# Altium PCB STM32_PCB.PcbDoc
Units mm, origin at the board's own origin, x right, y up, seen from the top; angles counter-clockwise.
Board outline 45 x 45 mm, 2 copper layers (Top Layer, Bottom Layer); 38 components, 26 nets, 182 pads, 49 vias.
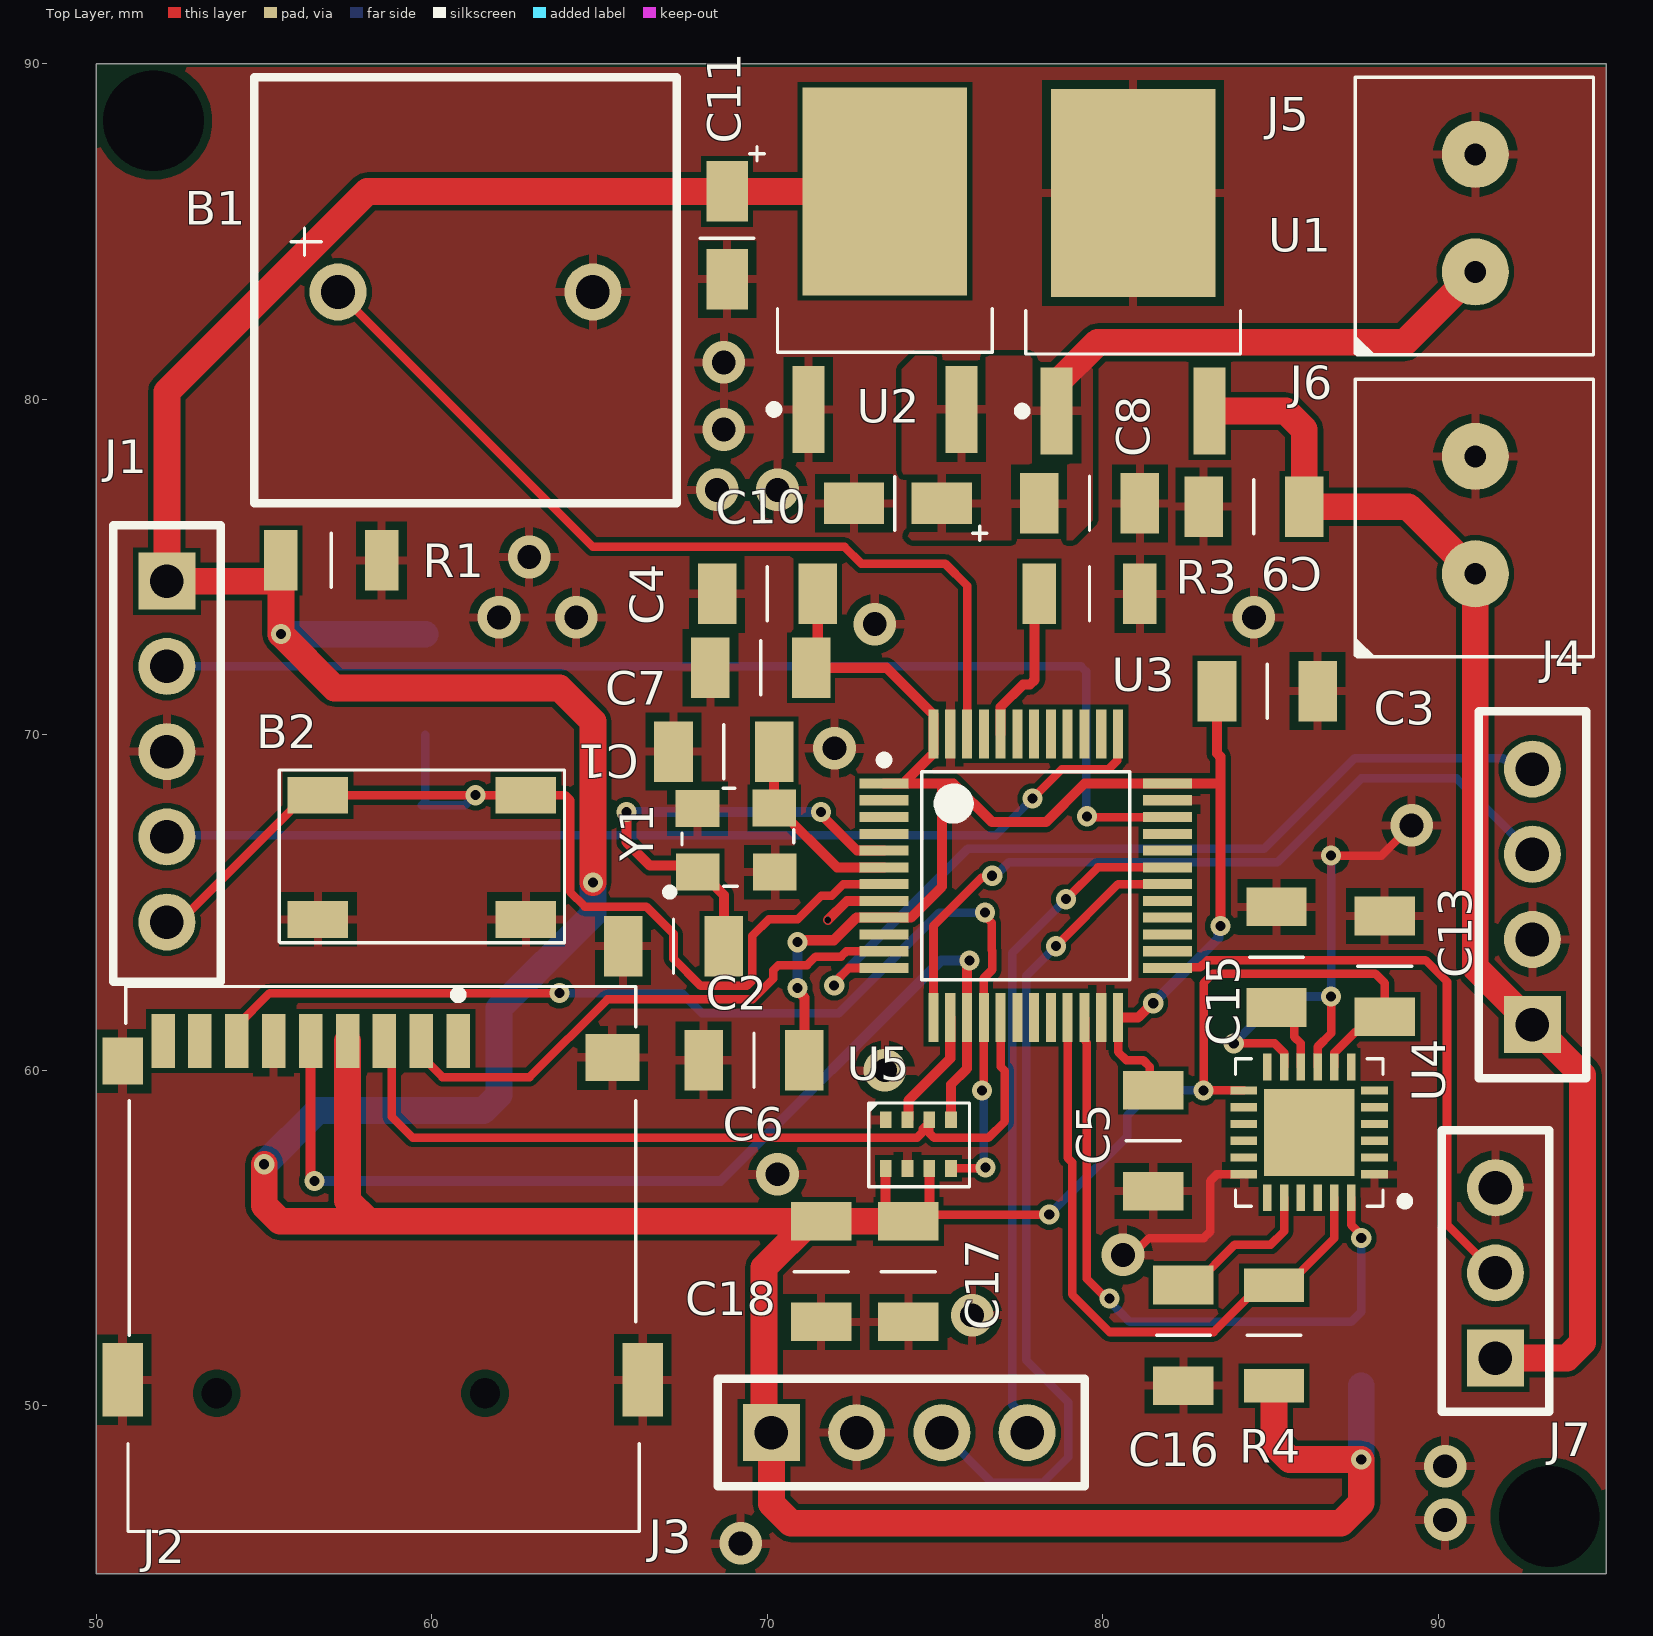
[diagram p0: Top Layer view]
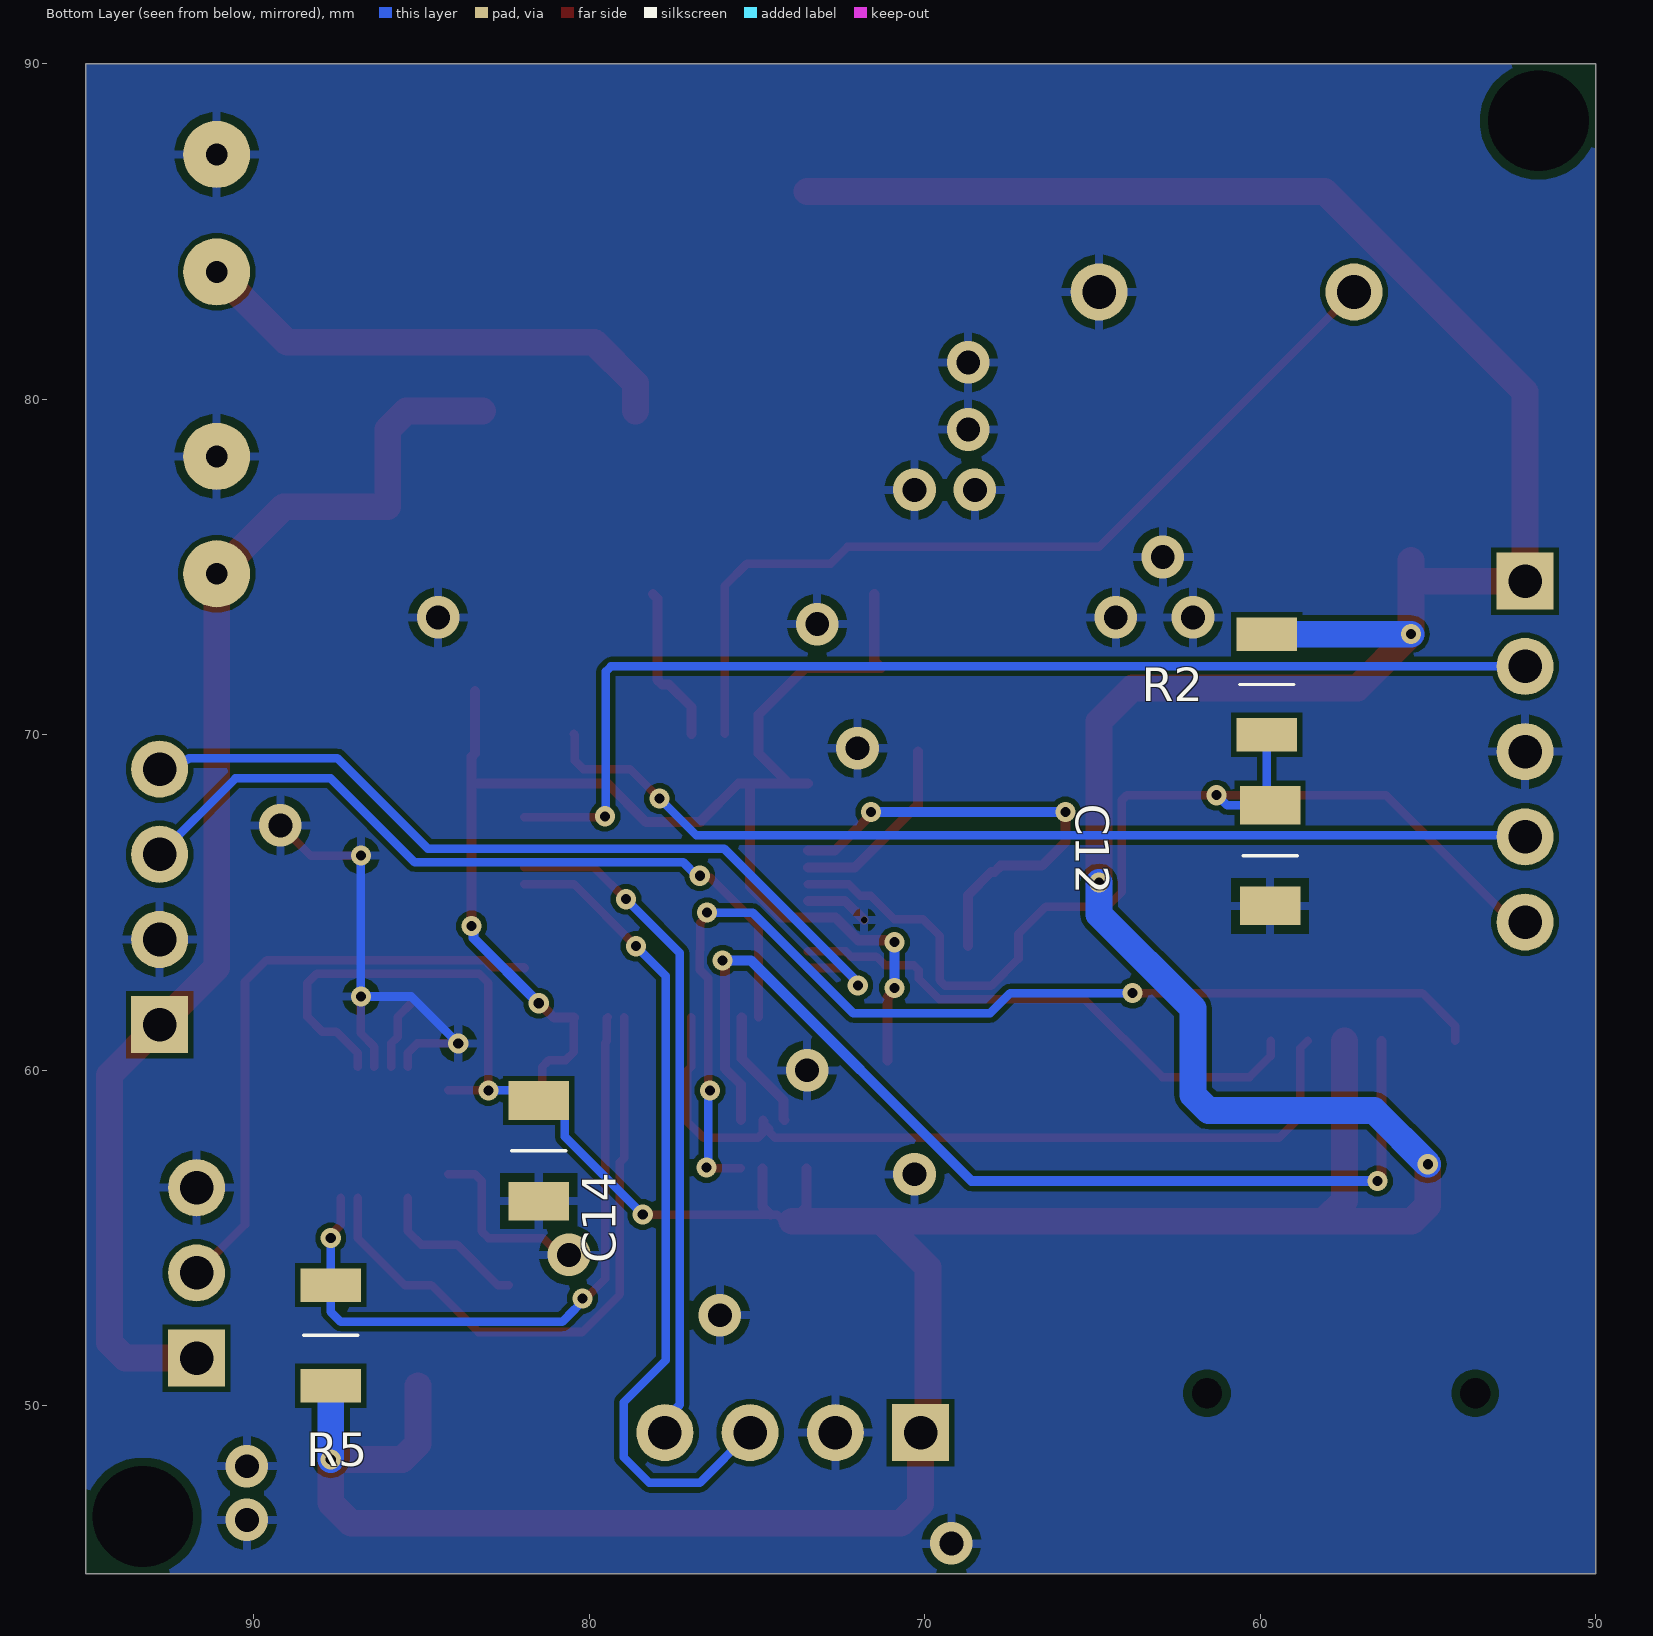
[diagram p1: Bottom Layer view, seen from below]
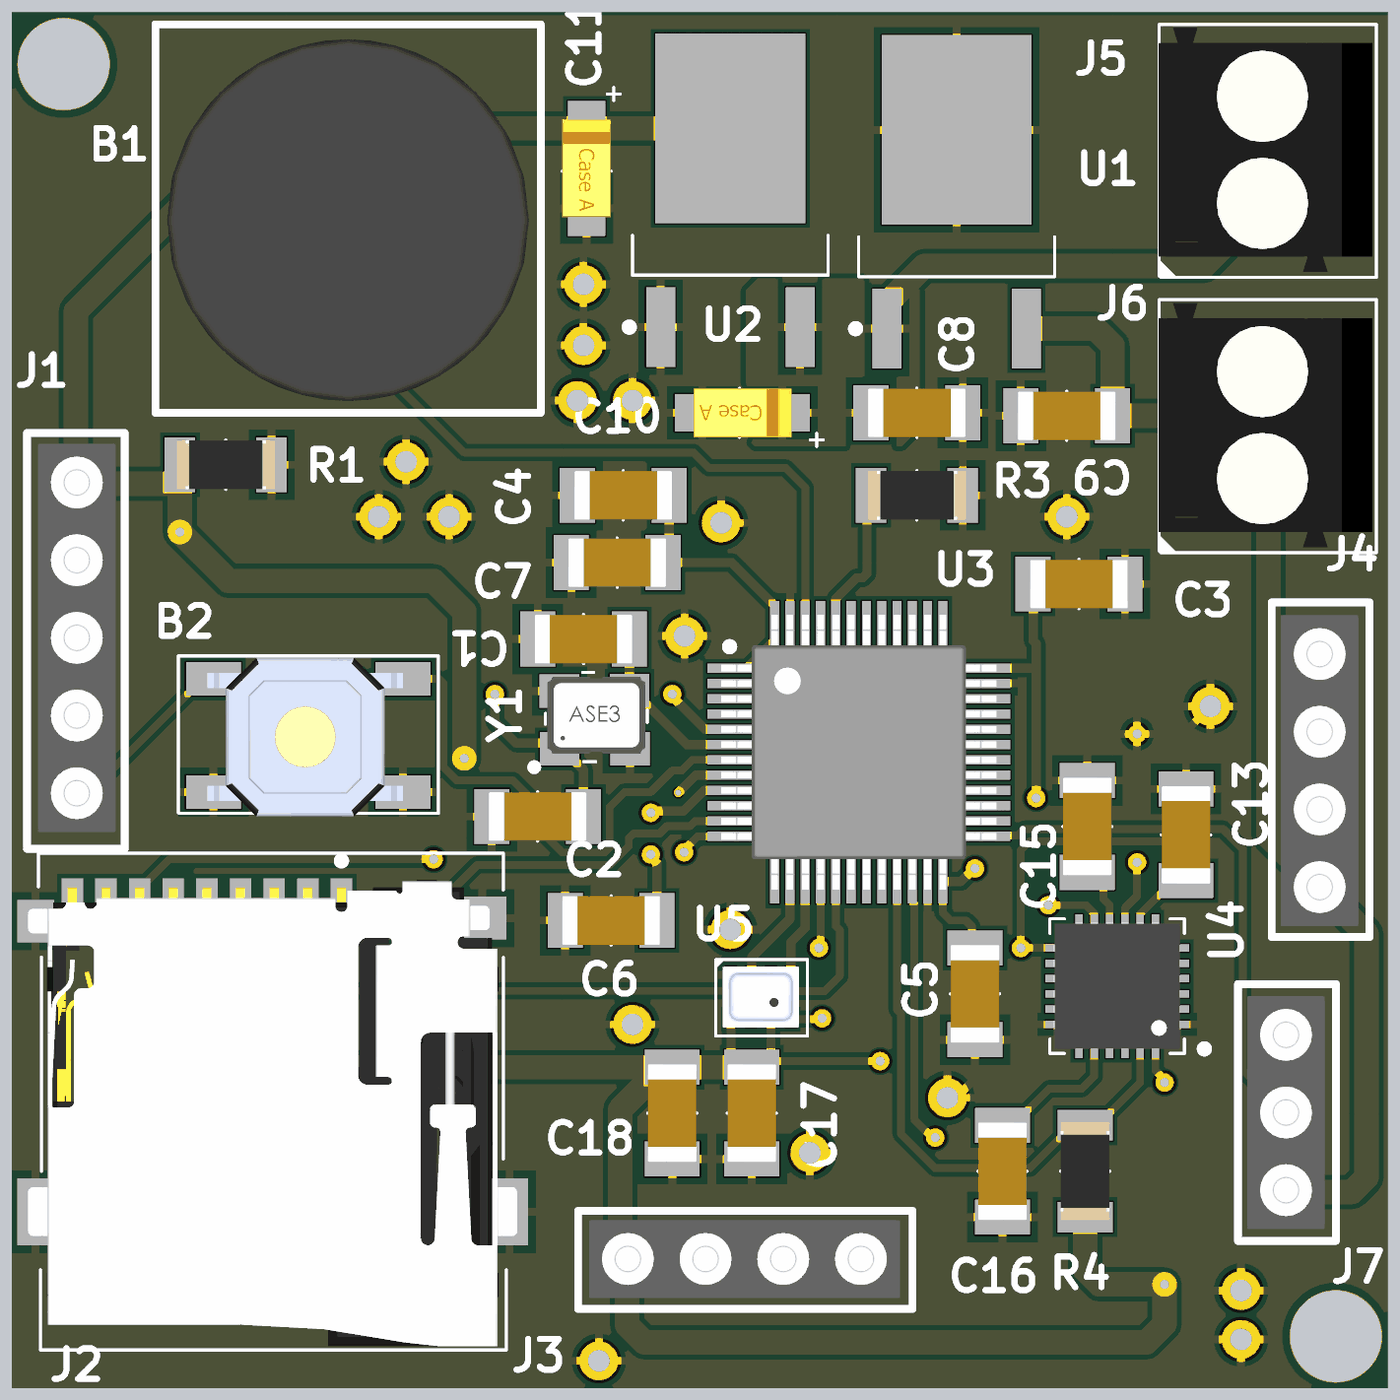
[diagram p2: 3D render of the assembled board from above, using the file's embedded part models]
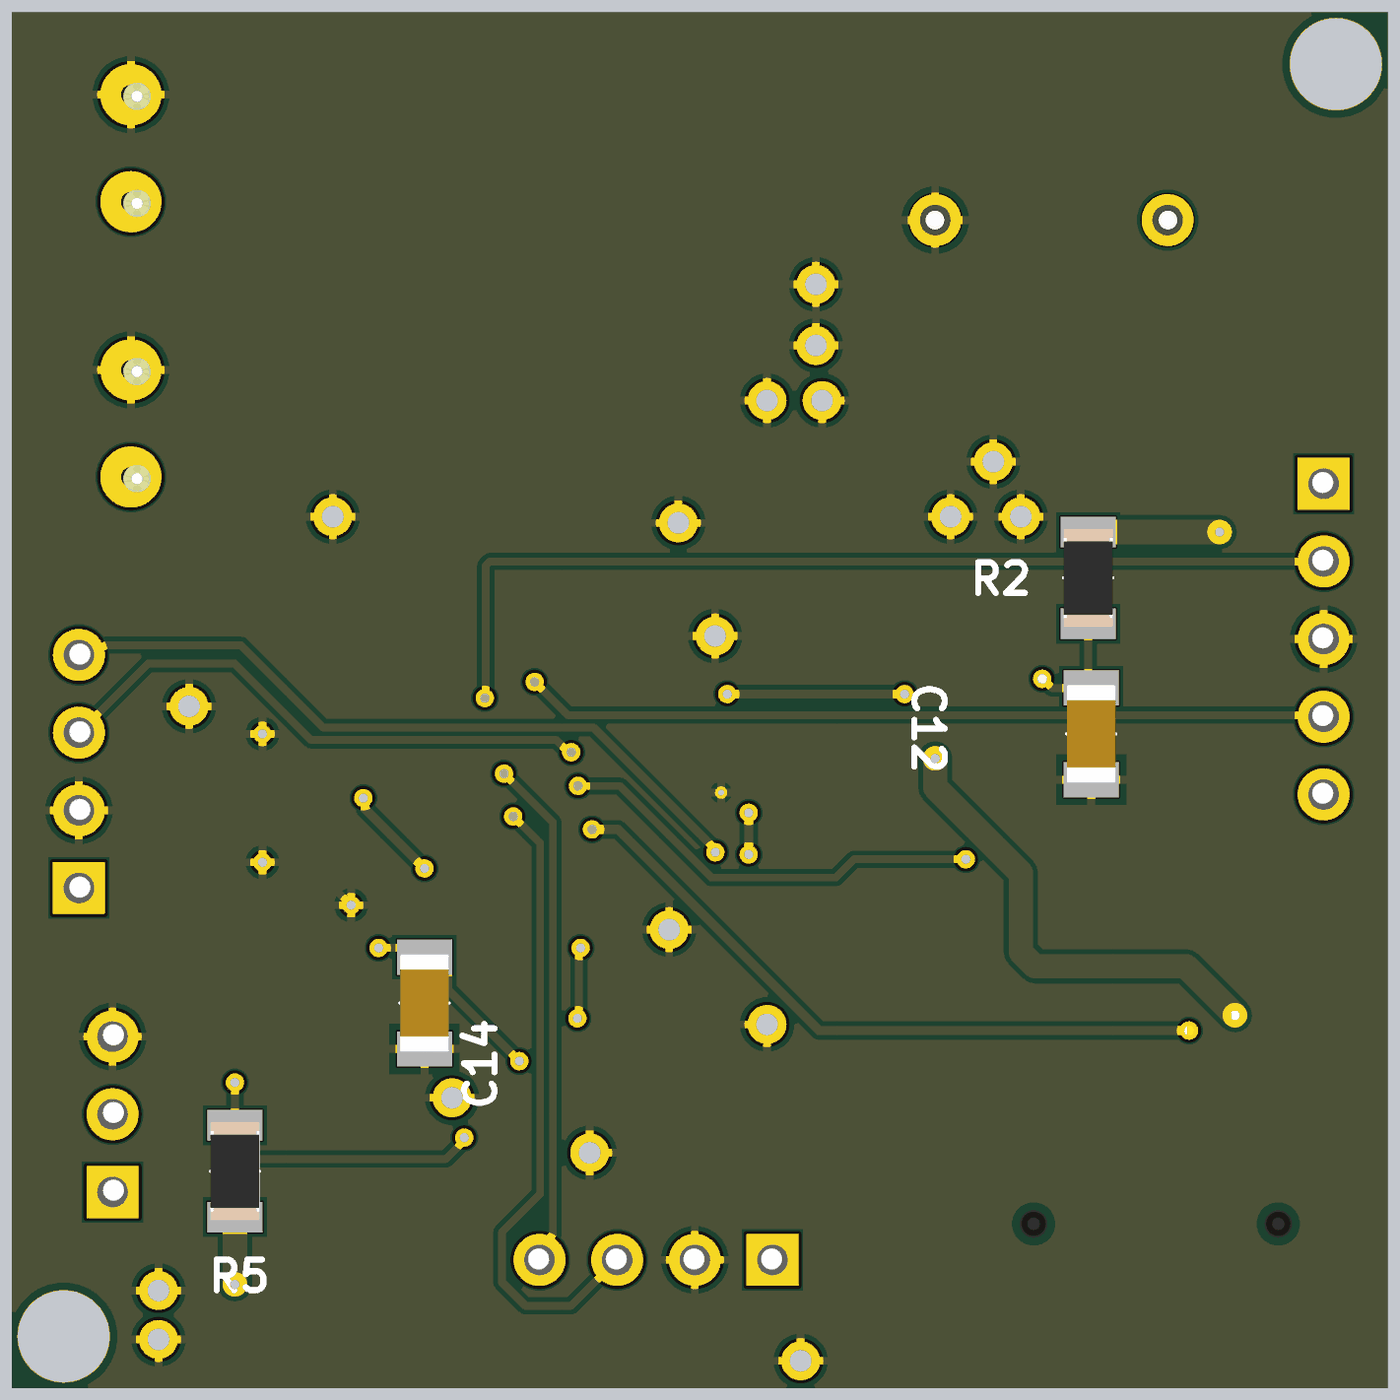
[diagram p3: 3D render of the assembled board from below, using the file's embedded part models]

## Layer stack, top to bottom
Top Solder: solder mask 0.0102, Solder Resist, Dk 3.5
Top Layer: signal copper 0.0356
Dielectric 1: dielectric 0.32, FR-4, Dk 4.8
Bottom Layer: signal copper 0.0356
Bottom Solder: solder mask 0.0102, Solder Resist, Dk 3.5

## Board outline
50,45 95,45 95,90 50,90

## Design rules (kind name [scope] priority, off if disabled: settings)
Clearance [All] p1: gap=0.254 ignorepadtopadclearanceinfootprint=FALSE except(0.152: Arc-Arc Arc-Track Arc-SMDPad Arc-Poly Track-Track Track-SMDPad Track-Poly SMDPad-SMDPad SMDPad-Poly THPad-Poly Via-Poly Fill-Poly Poly-Poly)
HoleSize [All] p1: absolutevalues=TRUE maxlimit=3.1 minlimit=0.025 maxpercent=80.000 minpercent=20.000
MinimumSolderMaskSliver [All] p1: minsoldermaskwidth=0.1
PolygonConnect [All] p1: connectstyle=Relief reliefconductorwidth=0.254 reliefentries=4 polygonreliefangle="90 Angle" airgapwidth=0.254
RoutingVias [All] p1: holewidth=0.3 width=0.6 viastyle="Through Hole" minholewidth=0.2 minwidth=0.2 maxholewidth=0.9 maxwidth=1.27
SilkToSolderMaskClearance [IsPad] p1: minsilkscreentomaskgap=0.1 clearancetoexposedcopper=TRUE
SolderMaskExpansion [All] p1: expansion=0.102 istentingtop=FALSE
Width [All] p1: maxlimit=1 minlimit=0.254 preferedwidth=0.3 minimp=50.000000 maximp=50.000000 favimp=50.000000
27 further rules are at their usual default settings.

## Classes and differential pairs
component class STM32_sematik: B1 B2 C1 C2 C3 C4 C5 C6 C7 C8 C9 C10 C11 C13 C14 C15 C16 C17 C18 J1 J2 J3 J4 J5 J7 R1 R2 R3 R4 R5 U1 U2 U3 U5 Y1

## Components (designator, comment, footprint, x,y, rotation, side; value= is the part's Value field where it differs from the comment)
B1 "Buzzer 5v" "Buzzer 5V" 57.2,83.2 r0 top
B2 "Push Button" "PUSB BUTTON-SMD" 56.6,68.2 r0 top
C1 "16pF C1206" C1206 68.7,69.6 r180 top
C2 "16pF C1206" C1206 67.2,63.8 r180 top
C3 "0.1 uF C1206" C1206 84.9,71.2 r0 top
C4 "0.1 uF C1206" C1206 70,74.3 r180 top
C5 "0.1 uF C1206" C1206 81.4,57.9 r270 top
C6 "0.1 uF C1206" C1206 69.6,60.4 r180 top
C7 "0.1 uF C1206" C1206 69.8,72.1 r180 top
C8 "330 nF C1206" C1206 79.6,77 r180 top
C9 "0.1 uF C1206" C1206 84.5,76.7 r0 top
C10 "10 uF C1206 - TANTAL" "C1206 - TANTAL" 73.9,76.9 r180 top
C11 "10 uF C1206 - TANTAL" "C1206 - TANTAL" 68.8,84.9 r270 top
C12 "0.1 uF C1206" C1206 59.6,66.4 r90 bottom
C13 "0.1 uF C1206" C1206 88.5,63.1 r90 top
C14 "0.1 uF C1206" C1206 81.6,57.6 r270 bottom
C15 "0.1 uF C1206" C1206 85.073,63.373 r270 top
C16 "2.2 nF C1206 CAPACITOR" C1206 82.3,52.1 r270 top
C17 "0.1 uF C1206" C1206 74.1,54 r270 top
C18 "0.1 uF C1206" C1206 71.5,54 r270 top
J1 "Header 2.54 1x5" "Header 2.54 1x5" 52.1,72.04 r270 top
J2 "Micro SD Card Holder" "Micro SD Card Holder" 58.1,53.8 r0 top
J3 "Header 2.54 1x4" "Header 2.54 1x4" 72.66,49.2 r0 top
J4 "Header 2.54 1x4" "Header 2.54 1x4" 92.8,63.9 r90 top
J5 "klemens 1x2 3.5mm" "klemens 1x2 3.5mm" 91.1,85.55 r90 top
J6 "klemens 1x2 3.5mm" "klemens 1x2 3.5mm" 91.1,76.55 r90 top
J7 "Header 2.54 1x3" "Header 2.54 1x3" 91.7,51.42 r90 top
R1 "10K RESISTOR R1206" "R1206 RESISTER" 57,75.2 r180 top
R2 "10K RESISTOR R1206" "R1206 RESISTER" 59.8,71.5 r90 bottom
R3 "10K RESISTOR R1206" "R1206 RESISTER" 79.6,74.2 r0 top
R4 "4.7K RESISTOR R1206" "R1206 RESISTER" 85.1,52.1 r270 top
R5 "4.7K RESISTOR R1206" "R1206 RESISTER" 87.7,52.1 r270 bottom
U1 "L7805-DPAK REGULATOR" "L7805 DPAK" 80.9,83.8 r90 top
U2 "LD108633-DPAK REGULATOR" "L7805 DPAK" 73.5,83.85 r90 top
U3 "STM32F101" LQFP48-STM 77.7,65.8 r0 top
U4 "MPU6050" MPU6050 86.15,58.15 r180 top
U5 "BMP280" BMP280 74.5,57.8 r0 top
Y1 "8 MHz 12.5 pf OSCILLATOR" "8 MHZ OSCILLATOR" 68.9,66.4 r0 top

## Footprints (in the part's own frame and the unit in brackets; to place one, negate y for a bottom-side part, rotate by r counter-clockwise, add the part's x,y. Pads: shape width x height; smd on the part's side, far side on the other; paste and mask are expansions set on the pad)
"8 MHZ OSCILLATOR" [mm]
  rect 1.3x1.1 smd mask+0.05: 1(-0.981,-0.49) 2(1.319,-0.49) 3(1.303,1.417) 4(-0.986,1.401)
  silkscreen extent -1.91,-1.19 1.88,2.01, body extent -1.38,-0.64 1.82,1.86, height 1.22
BMP280 [mm]
  rect 0.35x0.5 smd mask+0.05: 1(-0.975,0.725) 2(-0.325,0.725) 3(0.325,0.725) 4(0.975,0.725) 5(0.975,-0.725) 6(0.325,-0.725) 7(-0.325,-0.725) 8(-0.975,-0.725)
  silkscreen extent -1.5,-1.28 1.52,1.22, body extent -1.25,-1 1.25,1, height 0.95
"Buzzer 5V" [mm]
  round 1.7 hole 1 mask+0.05: 1(0,0) 2(7.6,0)
  silkscreen extent -2.5,-6.3 10.1,6.4, body extent -2.12,-5.91 9.72,5.91, height 8.48
C1206 [mm]
  rect 1.15x1.8 smd mask+0.05: 1(-1.5,0.1) 2(1.5,0.1)
  silkscreen extent 0,-0.7 0,0.91, body extent -1.6,-0.7 1.6,0.9, height 1
"C1206 - TANTAL" [mm]
  rect 1.8x1.23 smd mask+0.05: 1(-1.3,0) 1(-1.3,0) 2(1.32,0)
  silkscreen extent -2.64,-0.8 0.1,1.1, body extent -1.6,-0.8 1.6,0.8, height 1.62
"Header 2.54 1x3" [mm]
  rect 1.7x1.7 hole 1: 1(0,0)
  round 1.7 hole 1: 2(2.54,0) 3(5.08,0)
  silkscreen extent -1.6,-1.6 6.8,1.6, body extent -1.21,-1.24 6.41,1.3, height 6.52
"Header 2.54 1x4" [mm]
  rect 1.7x1.7 hole 1: 1(-2.54,0)
  round 1.7 hole 1: 2(0,0) 3(2.54,0) 4(5.08,0)
  silkscreen extent -4.14,-1.6 6.8,1.6, body extent -3.78,-1.24 6.38,1.3, height 6.72
"Header 2.54 1x5" [mm]
  rect 1.7x1.7 hole 1: 1(-2.54,0)
  round 1.7 hole 1: 2(0,0) 3(2.54,0) 4(5.08,0) 5(7.62,0)
  silkscreen extent -4.2,-1.6 9.4,1.6, body extent -3.85,-1.24 8.85,1.3, height 6.72
"klemens 1x2 3.5mm" [mm]
  round 2 hole 0.65: 1(-1.75,0) 2(1.75,0)
  silkscreen extent -4.26,-3.52 4.05,3.63, body extent -4.05,-3.4 3.94,3.6, height 8.9
"L7805 DPAK" [mm] "D-PAK, 3-Pads, Body 6.40x6.56mm (max), IPC Medium Density"
  rect 2.6x0.95 smd mask+0.05: 1(-4.15,2.28) 2(-4.15,-2.28)
  rect 6.2x4.9 smd mask+0.05: 3(2.35,0)
  silkscreen extent -4.27,-3.2 -1.15,3.43, body extent -2.85,-3.2 3.75,3.2, height 2.38
LQFP48-STM [mm] "TSQFP, 48-Leads, Body 7.00x7.00mm, Pitch 0.50mm, IPC Medium Density"
  rect 1.45x0.3 smd paste+0 mask+0.05: 1(-4.225,2.75) 2(-4.225,2.25) 3(-4.225,1.75) 4(-4.225,1.25) 5(-4.225,0.75) 6(-4.225,0.25) 7(-4.225,-0.25) 8(-4.225,-0.75) 9(-4.225,-1.25) 10(-4.225,-1.75) 11(-4.225,-2.25) 12(-4.225,-2.75) 25(4.225,-2.75) 26(4.225,-2.25) 27(4.225,-1.75) 28(4.225,-1.25) 29(4.225,-0.75) 30(4.225,-0.25) 31(4.225,0.25) 32(4.225,0.75) 33(4.225,1.25) 34(4.225,1.75) 35(4.225,2.25) 36(4.225,2.75)
  rect 0.3x1.45 smd paste+0 mask+0.05: 13(-2.75,-4.225) 14(-2.25,-4.225) 15(-1.75,-4.225) 16(-1.25,-4.225) 17(-0.75,-4.225) 18(-0.25,-4.225) 19(0.25,-4.225) 20(0.75,-4.225) 21(1.25,-4.225) 22(1.75,-4.225) 23(2.25,-4.225) 24(2.75,-4.225)
  rect 0.3x1.45 smd mask+0.05: 37(2.75,4.225) 38(2.25,4.225) 39(1.75,4.225) 40(1.25,4.225) 41(0.75,4.225) 42(0.25,4.225) 43(-0.25,4.225) 44(-0.75,4.225) 45(-1.25,4.225) 46(-1.75,4.225) 47(-2.25,4.225) 48(-2.75,4.225)
  silkscreen extent -4.35,-3.1 3.1,3.57, body extent -4.5,-4.5 4.5,4.5, height 1.6
"Micro SD Card Holder" [mm]
  rect 0.7x1.6 smd paste+0 mask+0: 1(2.684,7.075) 2(1.584,7.075) 3(0.484,7.075) 4(-0.616,7.075) 5(-1.716,7.075) 6(-2.816,7.075) 7(-3.916,7.075) 8(-5.016,7.075) Cd(-6.116,7.075)
  rect 1.2x1.4 smd paste+0 mask+0: 10(-7.316,6.475)
  rect 1.6x1.4 smd paste+0 mask+0: 11(7.284,6.575)
  rect 1.2x2.2 smd paste+0 mask+0: 12(-7.316,-3.025) 13(8.184,-3.025)
  round 0 hole 0.9 unplated paste-1000 mask+0: ""(-4.516,-3.425) ""(3.484,-3.425)
  silkscreen extent -7.22,-7.55 8.08,8.7, body extent -7.57,-7.42 8.43,7.83, height 1.85
MPU6050 [mm] "QFN, 24-Leads, Body 4.00x4.00mm, Pitch 0.50mm, Thermal Pad 2.70x2.60mm, IPC Medium Density"
  rect 0.8x0.25 smd mask+0.05: 1(-1.95,1.25) 2(-1.95,0.75) 3(-1.95,0.25) 4(-1.95,-0.25) 5(-1.95,-0.75) 6(-1.95,-1.25) 13(1.95,-1.25) 14(1.95,-0.75) 15(1.95,-0.25) 16(1.95,0.25) 17(1.95,0.75) 18(1.95,1.25)
  rect 0.25x0.8 smd mask+0.05: 7(-1.25,-1.95) 8(-0.75,-1.95) 9(-0.25,-1.95) 10(0.25,-1.95) 11(0.75,-1.95) 12(1.25,-1.95) 19(1.25,1.95) 20(0.75,1.95) 21(0.25,1.95) 22(-0.25,1.95) 23(-0.75,1.95) 24(-1.25,1.95)
  rect 2.7x2.6 smd mask+0.05: 25(0,0)
  silkscreen extent -2.97,-2.2 2.2,2.2, body extent -2.07,-2.07 2.07,2.07, height 0.9
"PUSB BUTTON-SMD" [mm]
  rect 1.8x1.1 smd mask+0.05: 1(0,0) 2(6.2,0) 3(0,-3.7) 4(6.2,-3.7)
  silkscreen extent -1.15,-4.4 7.35,0.75, body extent -0.2,-4.5 6.2,0.7, height 1.5
"R1206 RESISTER" [mm]
  rect 1x1.8 smd mask+0.05: 1(-1.5,0) 2(1.5,0)
  silkscreen extent 0,-0.8 0,0.81, body extent -1.6,-0.8 1.6,0.81, height 0.55

## Part data
B2: "Smd Push Button", Satın Alma Linki=https://urun.n11.com/diger/mini-pushbutton-switch-smd-P227461537?gclid=Cj0KCQjwkoDmBRCcARIsAG3xzl8Y_-jeD7HocNM6lvuZ_rVp83568XPGtNzlPwXWLph8oCRqo0yh87UaApZYEALw_wcB&gclsrc=aw.ds
C1 C2: "16 pF C1206"
C10 C11: "10 UF C1206 - TANTAL"
J5 J6: "Klemens 1x2 3.5mm"
R1 R2 R3 R4 R5: "R1206 RESISTER"
U1: "L7805 5V REGULATOR SMD PAKET"
U2: "LD108633 3.3V REGULATOR"
U3: "STM32F101,48 pinli microislemci"
U4: "MPU6050 GYRO"
U5: "BMP280 SENSOR"

## Free pads (board coordinates)
  round 0 hole 3: 4(51.7,88.3) 4(93.3,46.7)

## Via types
v1: diameter 0.6, hole 0.3, Top Layer to Bottom Layer, 30 vias
v2: diameter 1.27, hole 0.711, Top Layer to Bottom Layer, 18 vias
v3: diameter 0.2, hole 0.2, Top Layer to Bottom Layer, 1 vias

## Nets (pads, with @x,y where several pads share a name; then routed paths per layer and width w, separated by ;. In a path a pad name is that pad's centre, name@x,y a point inside that pad or via, vN(x,y) a via of type N, cw(c..) or ccw(c..) an arc to the next point about the centre after c; other vN are vias at no path point)
3.3V: C11.1 C13.1 C14.1 C17.1 C18.1 J1.1 J2.4 J3.1 R1.2 R2.2 R4.2 R5.2 U2.3 U4.8 U4.13 U5.6 U5.8 | length 159.2
  Top Layer w0.254: C17.1 74.4,55.7 74.6,55.7 v1(78.4,55.7) ; U4.13 v1(83,59.4) 83,62.6 83.281,62.881 88.119,62.881 88.4,62.6 C13.1 87.952,61.152 87.532,61.152 86.902,60.522 86.902,60.102 U4.8
  Top Layer w0.3: U5.8 73.525,55.925 73.95,55.5 C17.1 ; C17.1@74.6,55.7 74.825,55.925 U5.6
  Top Layer w0.8: v1(55,57.2) 55,55.969 55.469,55.5 58.1,55.5 ; R1.2 R1.2@55.5,74.8 ; J2.4 57.484,56.116 58.1,55.5 ; v1(64.8,65.6) 64.8,70.4 63.8,71.4 57.1,71.4 v1(55.5,73) R1.2@55.5,74.8 ; U2.3 68.8,86.2 58.073,86.2 52.1,80.227 J1.1 55.28,74.58 R1.2@55.5,74.8 ; C17.1@73.95,55.5 C18.1 ; R4.2 85.1,48.869 85.569,48.4 v1(87.7,48.4) 87.7,47.1 87.1,46.5 70.7,46.5 70.12,47.08 J3.1 69.9,49.42 69.9,54.125 71.275,55.5 C18.1 ; 58.1,55.5 C18.1
  Bottom Layer w0.254: v1(78.4,55.7) 80.727,58.027 80.727,58.652 81.175,59.1 C14.1 81.8,59.4 v1(83,59.4)
  Bottom Layer w0.8: v1(55,57.2) 56.6,58.8 61.531,58.8 62,59.269 62,61.849 64.8,64.649 v1(64.8,65.6) ; v1(55.5,73) R2.2 ; v1(87.7,48.4) R5.2
3V: C3.1 C4.1 C5.1 C6.1 C7.1 U3.1 U3.9 U3.24 U3.36 U3.48 | length 45.9
  Top Layer w0.254: U3.24 80.45,60.55 80.7,60.3 81.2,60.3 81.4,60.1 81.4,59.5 C5.1
  Top Layer w0.3: v1(70.9,62.457) 70.9,62.376 71.1,62.176 C6.1 ; v1(70.9,63.819) 70.957,63.876 71.976,63.876 72.65,64.55 74.277,64.55 75.2,65.473 75.2,68.55 ; C4.1 71.5,72.2 C7.1 73.55,72 74.95,70.6 U3.48 74.95,69.45 U3.1@74.05,68.55 ; U3.1 U3.1@74.05,68.55 ; U3.24 81.05,61.575 81.475,62 v1(81.5,62) ; C3.1 83.4,69.45 83.5,69.35 83.5,68.6 ; v1(83.5,64.3) 83.5,68.6 ; U3.1@74.05,68.55 75.2,68.55 ; 75.2,68.55 75.544,68.55 76.698,67.396 78.3,67.396 79.454,68.55 U3.36 83.45,68.55 83.5,68.6
  Bottom Layer w0.3: v1(70.9,62.457) v1(70.9,63.819) ; v1(81.5,62) 83.443,63.943 83.443,64.243 v1(83.5,64.3)
5V: C9.2 J4.1 J6.1 J7.1 U1.2 | length 38.3
  Top Layer w0.8: U1.2 85.45,79.65 86,79.1 C9.2 89.1,76.8 J6.1 91.1,63.06 J4.1 94.3,59.86 94.3,51.889 93.831,51.42 J7.1
7.4V: C8.2 C10.1 J5.1 U1.1 U2.2 | length 14.7
  Top Layer w0.8: U1.1 78.62,80.475 79.845,81.7 89,81.7 J5.1
GND: B1.2 B2.3 B2.4 C1.2 C2.2 C3.2 C4.2 C5.2 C6.2 C7.2 C8.1 C9.1 C10.2 C11.2 C12.1 C13.2 C14.2 C15.1 C16.2 C17.2 C18.2 J1.3 J2.6 J2.10 J2.11 J2.12 J2.13 J3.2 J4.2 J5.2 J6.2 J7.3 R1.1 R3.2 U1.3 U2.1 U3.8 U3.23 U3.35 U3.47 U4.1 U4.9 U4.11 U4.18 U5.1 U5.7 Y1.2 Y1.4 | length 22.1
  Top Layer w0.254: v2(80.6,54.5) 80.875,54.5 81.375,55 83,55 83.2,55.2 83.2,56.7 83.4,56.9 U4.18 ; v1(83.9,60.8) 85.12,60.8 85.398,60.522 85.398,60.102 U4.11 ; U4.9 86.402,60.102 86.402,60.702 86.8,61.1 v1(86.8,62.2) ; v1(86.8,66.4) 88.3,66.4 v2(89.2,67.3)
  Top Layer w0.3: v3(71.801,64.48) 72.371,65.05 U3.8
  Bottom Layer w0.254: v1(83.9,60.8) 85.3,62.2 v1(86.8,62.2) v1(86.8,66.4)
  other v2: 69.2,45.9 90.2,46.6 90.2,48.2 76.1,52.7 70.3,56.9 73.5,60 72,69.6 73.2,73.3 62,73.5 64.3,73.5 84.5,73.5 62.9,75.3 68.5,77.3 70.3,77.3 68.7,79.1 68.7,81.1
NetB1_1: B1.1 U3.46 | length 26.8
  Top Layer w0.254: B1.1 64.8,75.6 72.3,75.6 72.8,75.1 75.3,75.1 75.95,74.45 U3.46
NetC1_1: C1.1 U3.6 Y1.3 | length 5.7
  Top Layer w0.3: C1.1 70.2,67.821 Y1.3 70.303,67.817 72.071,66.05 U3.6
NetC2_1: C2.1 U3.5 Y1.1 | length 14.2
  Top Layer w0.3: v1(65.8,67.7) 65.8,66.8 66.5,66.1 67.729,66.1 Y1.1 68.019,65.91 68.7,65.229 C2.1 ; v1(71.6,67.7) 71.6,67.623 72.673,66.55 U3.5
  Bottom Layer w0.3: v1(65.8,67.7) v1(71.6,67.7)
NetC15_2: C15.2 U4.10 | length 2.1
  Top Layer w0.254: C15.2@85.3,62 85.7,61.6 85.7,61 85.9,60.8 U4.10
NetC16_1: C16.1 U4.20 | length 4.7
  Top Layer w0.254: C16.1 82.725,53.6 83.925,54.8 85,54.8 85.4,55.2 U4.20
NetJ1_2: J1.2 U3.34 | length 34.2
  Top Layer w0.254: v1(79.528,67.572) 79.55,67.55 U3.34
  Bottom Layer w0.254: J1.2 79.351,72.04 79.5,71.891 79.5,67.6 v1(79.528,67.572)
NetJ1_4: J1.4 U3.37 | length 30.1
  Top Layer w0.254: v1(77.9,68.1) 78.779,68.979 80.174,68.979 80.427,69.232 80.427,70.002 U3.37
  Bottom Layer w0.254: J1.4 52.152,67.012 76.812,67.012 v1(77.9,68.1)
NetJ2_2: J2.2 U3.11 | length 16.2
  Top Layer w0.254: J2.2 59.684,60.425 60.313,59.796 62.91,59.796 65.229,62.115 69.559,62.115 70.179,62.735 70.179,62.989 70.328,63.138 71.182,63.138 71.434,63.39 72.197,63.39 72.357,63.55 U3.11
NetJ2_3: J2.3 U3.17 U5.3 | length 24.9
  Top Layer w0.254: J2.3 58.807,60.652 58.807,58.612 59.423,57.996 74.466,57.996 74.629,58.159 74.629,58.254 74.777,58.402 74.777,58.477 U5.3 ; U5.3@74.825,58.45 74.825,58.133 74.974,57.984 76.584,57.984 77.077,58.477 77.077,59.984 76.95,60.111 U3.17
NetJ2_5: J2.5 U3.15 U5.4 | length 31.4
  Top Layer w0.3: J2.5 56.384,56.897 56.5,56.781 v1(56.5,56.7) ; U5.4 75.475,59.575 75.95,60.05 75.95,63.124 76.022,63.197 v1(76.022,63.278)
  Bottom Layer w0.3: v1(56.5,56.7) 68.6,56.7 75.178,63.278 v1(76.022,63.278)
NetJ2_7: J2.7 U3.16 U5.5 | length 33.5
  Top Layer w0.254: J2.7 54.184,61.325 55.159,62.3 v1(63.8,62.3) ; U5.5 76.475,57.075 v1(76.5,57.1) ; v1(76.396,59.4) 76.45,59.454 U3.16 76.45,62.743 76.703,62.996 76.703,63.56 76.681,63.582 76.681,64.405 76.48,64.605 v1(76.48,64.699)
  Bottom Layer w0.254: v1(63.8,62.3) 67.447,62.3 68.047,61.7 72.124,61.7 75.123,64.699 v1(76.48,64.699) ; v1(76.396,59.4) 76.45,59.346 76.45,57.15 v1(76.5,57.1)
NetJ3_3: J3.3 U3.30 | length 24.9
  Top Layer w0.254: v1(78.6,63.7) 80.45,65.55 U3.30
  Bottom Layer w0.254: J3.3 76.7,47.7 78.2,47.7 78.971,48.471 78.971,50.1 77.719,51.352 77.719,62.819 v1(78.6,63.7)
NetJ3_4: J3.4 U3.31 | length 20.2
  Top Layer w0.254: v1(78.9,65.1) 79.85,66.05 U3.31
  Bottom Layer w0.254: J3.4 77.74,49.591 77.3,50.031 77.3,63.5 v1(78.9,65.1)
NetJ4_3: J4.3 U3.13 | length 23.3
  Top Layer w0.254: U3.13 74.95,64.311 76.373,65.734 76.634,65.734 v1(76.7,65.8)
  Bottom Layer w0.254: v1(76.7,65.8) 76.794,65.8 77.194,66.2 85.2,66.2 87.7,68.7 90.54,68.7 J4.3
NetJ4_4: J4.4 U3.12 | length 25.6
  Top Layer w0.254: v1(71.99,62.529) 71.99,62.609 72.431,63.05 U3.12 ; J4.4 J4.4@92.8,69
  Bottom Layer w0.254: v1(71.99,62.529) 71.99,62.623 75.973,66.606 84.806,66.606 87.5,69.3 91.928,69.3 91.972,69.257 92.523,69.257 J4.4
NetJ7_2: J7.2 U3.25 | length 18
  Top Layer w0.254: U3.25 81.948,63.073 82.899,63.073 83.113,63.287 89.613,63.287 90.256,62.644 90.256,55.404 J7.2
NetR3_1: R3.1 U3.44 | length 4.8
  Top Layer w0.3: U3.44 76.95,70.827 77.623,71.5 77.824,71.5 77.967,71.642 77.967,74.067 R3.1
NetR4_1: R4.1 U3.21 U4.23 | length 19
  Top Layer w0.254: U3.21 78.95,57.39 79.081,57.259 79.081,53.319 80.2,52.2 83.3,52.2 84.7,53.6 R4.1 85.5,53.6 86.9,55 U4.23
NetR5_1: R5.1 U3.22 U4.24 | length 20.2
  Top Layer w0.254: U3.22 79.473,61.552 79.473,60.876 79.521,60.828 79.521,53.784 79.701,53.604 79.702,53.604 80.106,53.2 v1(80.2,53.2) ; U4.24 87.4,55.394 87.7,55.094 v1(87.7,55)
  Bottom Layer w0.254: v1(80.2,53.2) 80.2,53.106 80.62,52.686 80.62,52.68 80.8,52.5 87.4,52.5 87.7,52.8 v1(87.7,55)
NetU3_14: U3.14 U5.2 | length 3.6
  Top Layer w0.3: U5.2 74.2,58.55 74.2,59.1 75.45,60.35 U3.14
NRST: B2.1 B2.2 C12.2 J1.5 R2.1 U3.7 | length 33.2
  Top Layer w0.254: J1.5 52.47,64.42 56.25,68.2 B2.1 v1(61.3,68.2) B2.2 63.972,68.2 64.121,68.051 64.121,66.686 64.119,66.684 64.119,65.318 64.558,64.879 66.391,64.879 67.2,64.07 67.2,63.33 68.009,62.521 69.391,62.521 69.554,62.684 69.554,64.017 70.037,64.5 70.9,64.5 71.6,65.2 71.914,65.2 72.264,65.55 U3.7
  Bottom Layer w0.254: R2.1 59.8,68 C12.2 60.981,67.9 61.281,68.2 v1(61.3,68.2)
pads on no net: J2. J2.1 J2.8 J2.Cd U3.2 U3.3 U3.4 U3.10 U3.18 U3.19 U3.20 U3.26 U3.27 U3.28 U3.29 U3.32 U3.33 U3.38 U3.39 U3.40 U3.41 U3.42 U3.43 U3.45 U4.2 U4.3 U4.4 U4.5 U4.6 U4.7 U4.12 U4.14 U4.15 U4.16 U4.17 U4.19 U4.21 U4.22 U4.25

## Polygon pours and split planes (outlines as drawn)
GND on Top Layer "GND_L01_P004" (solid, pour order 4): 95,89.9 95,45 50,45 50,89.9
7.4V on Top Layer "7.4V_L01_P000" (solid, pour order 0): 79.7,80.9 79.3,81.3 74.4,81.3 74,80.9 74,76.1 74.3,75.8 79.1,75.8 79.7,76.4
GND on Bottom Layer "GND_L02_P003" (solid, pour order 3): 50,90 50,45 95,45 95,90

## Silkscreen, mask and mechanical layers (free items; w line width, h text height)
Mechanical 1:
  the board outline again, w0.1